# EAGLE board ESP32Breakout (EAGLE 9.5.2)
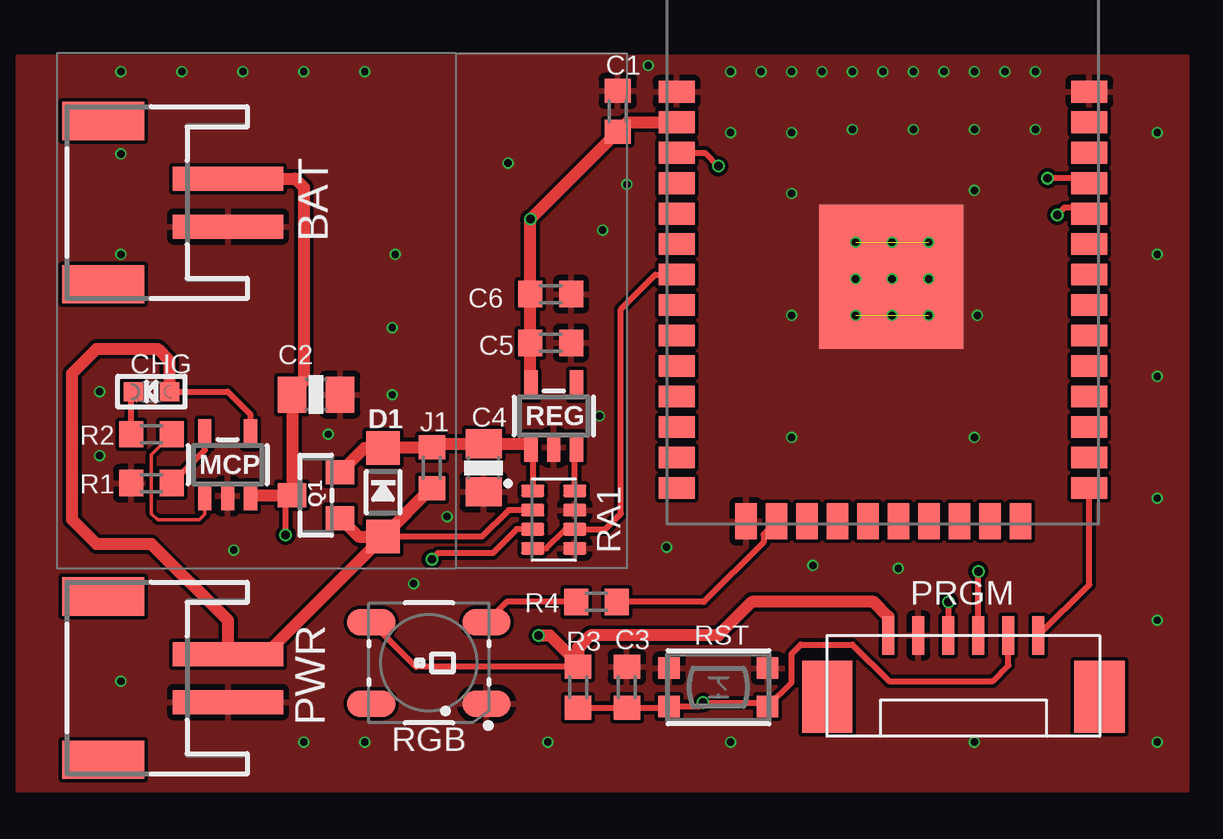
[diagram p0: board, top side]
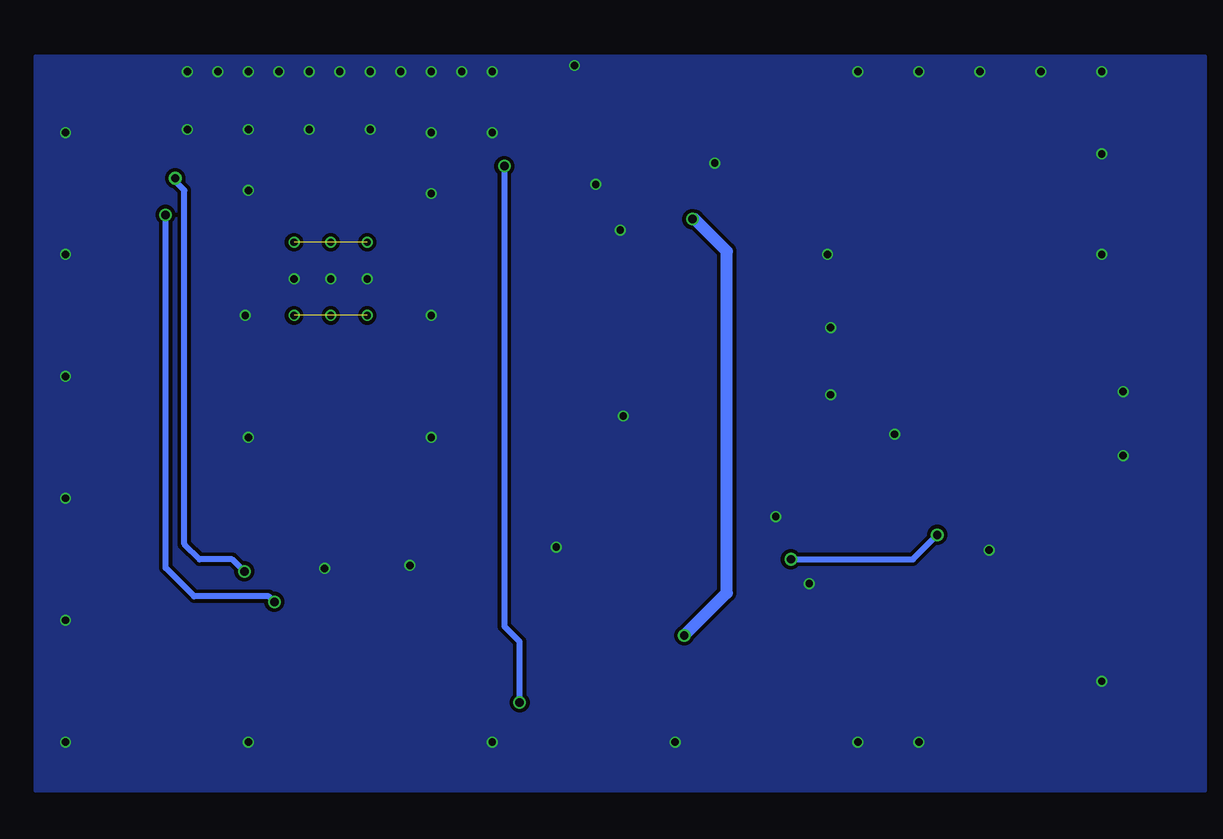
[diagram p1: board, bottom side, seen from below]

No outline drawn. Coordinates in mm, seen from the top.
Copper layers (1*16): Top 0.035559375mm / dielectric 1.6mm / Bottom 0.035559375mm
Design rules "jlcpcb2layer": minimum track width 5mil, minimum drill 12mil, track to track 5mil, track to pad 5mil, pad to pad 5mil, via to via 5mil, smd to smd 5mil, copper to edge 8mil, drill to drill 6mil, minimum pad ring 5mil, minimum via ring 3mil, stop-mask expansion 2.5mil, vias tented up to drill 20mil, thermal gap 10mil

## Footprints (pad centres in the part's own frame; a part is rotated, then mirrored left to right if it is on the bottom)
JST_PH_2.0_2P = smd 1 x 4.6: 1 -1,-3.7; 2 1,-3.7 | smd 1.6 x 3.4: NC1 -3.4,1.5; NC2 3.4,1.5
0603 = smd 1 x 1.1: 1 -0.85,0; 2 0.85,0
0805 = smd 1.2 x 1.5: 1 -1,0; 2 1,0
CHIPLED_0603 = smd 0.8 x 0.8: A 0,-0.75; C 0,0.75
SOD-123 = smd 1.4 x 1.4: A 1.85,0; C -1.85,0
MICROBUILDER_SOT23-5 = smd 0.55 x 1.2: 1 -0.95,-1.3; 2 0,-1.3; 3 0.95,-1.3; 4 0.95,1.3; 5 -0.95,1.3
JST1.25_6P = smd 0.5 x 1.6: 1 0,0; 2 1.25,0; 3 2.5,0; 4 3.75,0; 5 5,0; 6 6.25,0 | smd 2.1 x 3: 7 -2.55,2.55; 8 8.8,2.55
SOT23-WIDE = smd 1 x 1.2: 1 -0.95,-1; 2 0.95,-1; 3 0,1
RESCAF80P320X160X60-8N = smd 0.97 x 0.53: 1 -0.875,1.2; 2 -0.875,0.4; 3 -0.875,-0.4; 4 -0.875,-1.2; 5 0.875,-1.2; 6 0.875,-0.4; 7 0.875,0.4; 8 0.875,1.2
LED-TRICOLOR-5050-IC = smd 2 x 1.1: DIN -2.4,-1.7; DOUT 2.4,1.7; VDD 2.4,-1.7; VSS -2.4,1.7
BTN_KMR2_4.6X2.8 = smd 0.9 x 0.9: A 2.05,0.8; A' -2.05,0.8; B 2.05,-0.8; B' -2.05,-0.8
WROOM32 = smd 1.5 x 0.9: 1 -8.6,5; 2 -8.6,3.73; 3 -8.6,2.46; 4 -8.6,1.19; 5 -8.6,-0.08; 6 -8.6,-1.35; 7 -8.6,-2.62; 8 -8.6,-3.89; 9 -8.6,-5.16; 10 -8.6,-6.43; 11 -8.6,-7.7; 12 -8.6,-8.97; 13 -8.6,-10.24; 14 -8.6,-11.51; 25 8.6,-11.51; 26 8.6,-10.24; 27 8.6,-8.97; 28 8.6,-7.7; 29 8.6,-6.43; 30 8.6,-5.16; 31 8.6,-3.89; 32 8.6,-2.62; 33 8.6,-1.35; 34 8.6,-0.08; 35 8.6,1.19; 36 8.6,2.46; 37 8.6,3.73; 38 8.6,5 | smd 0.9 x 1.5: 15 -5.7,-12.9; 16 -4.43,-12.9; 17 -3.16,-12.9; 18 -1.89,-12.9; 19 -0.62,-12.9; 20 0.65,-12.9; 21 1.92,-12.9; 22 3.19,-12.9; 23 4.46,-12.9; 24 5.73,-12.9 | smd 6 x 6: P$1 0.34,-2.7

## Placement (x,y rotation side)
BAT  JSTPH  [JST_PH_2.0_2P]  -27.18,63.12 90 top
C1  0.1uF  [0603]  -7.24,66.93 90 top
C2  10µF  [0805]  -19.81,55.12 0 top
C3  1uF  [0603]  -6.86,42.93 90 top
C4  10µF  [0805]  -12.83,52.07 270 top
C5  1uF  [0603]  -10.03,57.28 0 top
C6  10µF  [0603]  -10.03,59.31 0 top
CHG  [CHIPLED_0603]  -26.67,55.24 90 top
D1  MBR120  [SOD-123]  -17.02,51.05 270 top
J1  [0603]  -14.99,52.07 90 top
MCP  MCP73831  [MICROBUILDER_SOT23-5]  -23.5,52.2 0 top
PRGM  JST_1.25_6P  [JST1.25_6P]  10.29,45.09 180 top
PWR  JST_PH_2.0_2P  [JST_PH_2.0_2P]  -27.18,43.31 90 top
Q1  DMG3415U  [SOT23-WIDE]  -19.81,50.93 90 top
R1  4.7k  [0603]  -26.67,51.44 180 top
R2  1k  [0603]  -26.67,53.47 0 top
R3  10k  [0603]  -8.89,42.93 90 top
R4  [0603]  -8.13,46.48 0 top
RA1  [RESCAF80P320X160X60-8N]  -9.91,49.91 0 top
REG  AP2112-3.3  [MICROBUILDER_SOT23-5]  -9.91,54.23 0 top
RGB  LED_WS2812  [LED-TRICOLOR-5050-IC]  -15.11,43.94 180 top
RST  KMR2  [BTN_KMR2_4.6X2.8]  -3.05,42.93 0 top
X2  ESP32_WROOM32  [WROOM32]  3.81,62.74 0 top

## Library data of the parts
BAT PRGM PWR = Scott-Connectors
C1-C6 CHG D1 J1 Q1 R1-R4 RA1 = Scott-Electrical
MCP REG RGB = Scott-ICs
RST = Scott-Switches
X2 = Scott-MCU

## Nets
3.3V: C1.1 C5.1 C6.1 PRGM.6 R3.2 REG.5 RGB.VDD X2.2
A13_I35: RA1.4 RA1.6 X2.7
EN: RA1.8 REG.3
GND: BAT.1 C1.2 C2.2 C3.2 C4.2 C5.2 C6.2 MCP.2 PRGM.5 PWR.1 R1.2 RA1.5 RA1.7 REG.2 RGB.VSS RST.A RST.A' X2.1 X2.15 X2.38 X2.P$1
GPIO0: PRGM.1 X2.25
IO13_A12: R4.2 X2.16
N$1: CHG.C R2.1
N$2: R4.1 RGB.DIN
N$3: MCP.1 R2.2
N$4: MCP.5 R1.1
N$7: C4.1 D1.C J1.2 Q1.2 RA1.1 REG.1
RESET: C3.1 PRGM.2 R3.1 RST.B RST.B' X2.3
RXD0: PRGM.4 X2.34
TXD0: PRGM.3 X2.35
VBAT: BAT.2 C2.1 MCP.3 Q1.3 RA1.3
VBUS: CHG.A D1.A J1.1 MCP.4 PWR.2 Q1.1 RA1.2

## Tracks (layer width: path | path; a pad name or v marks a point on that pad's centre or on a via)
3.3V  (via drill 0.35)
  Top 0.254: RGB.VDD -15.65,43.78 R3.2 -8.89,43.9
  Top 0.508: REG.5 -10.88,55.56 C5.1 C6.1 v-10.88,62.44 C1.1 -6.85,66.47 X2.2 | -8.89,43.9 -10.07,45.09 v-10.54,45.09 | PRGM.6 4.04,45.87 3.43,46.48 -1.65,46.48 -3.05,45.09 -8.38,45.09 -8.89,44.58 R3.2
  Bottom 0.254: -10.97,62.44 v-10.88,62.44
  Bottom 0.508: v-10.54,45.09 -12.32,46.86 -12.32,61.09 -10.97,62.44
A13_I35
  Top 0.254: RA1.4 -10.22,48.71 -9.42,49.51 RA1.6 -7.77,49.51 -7.11,50.16 -7.11,58.67 -5.67,60.12 X2.7
EN
  Top 0.254: RA1.8 -9.03,52.85 REG.3
GND  (via drill 0.3)
  other vias: 4.19,59.94 2.67,59.94 5.71,59.94 -2.54,68.58 -1.27,68.58 1.27,68.58 0,68.58 2.54,68.58 3.81,68.58 5.08,68.58 6.35,68.58 7.62,68.58 8.89,68.58 10.16,68.58 -27.94,65.15 -27.94,60.96 -16.51,60.96 -11.81,64.77 -6.86,63.88 -7.87,61.98 -2.54,66.04 0,66.04 2.54,66.17 5.08,66.17 7.62,66.17 10.16,66.17 7.62,63.63 7.75,58.42 7.62,53.34 0,53.34 0,58.42 0,63.5 4.45,47.88 0.89,48.01 -5.21,48.77 -23.24,48.64 -27.94,43.18 -20.32,40.64 -17.78,40.64 -10.16,40.64 -2.54,40.64 7.62,40.64 15.24,40.64 15.24,45.72 15.24,50.8 15.24,55.88 15.24,60.96 15.24,66.04 -8,54.23 -15.75,47.24 -28.83,52.58 -28.83,55.24 -19.3,53.47 -14.35,50.04 -16.64,57.91 -16.64,55.12 -5.97,68.83 -17.78,68.58 -20.32,68.58 -22.86,68.58 -25.4,68.58 -27.94,68.58
  pour Top (isolate 0.152, rank 6): -32.26,38.61 16.51,38.61 16.51,69.22 -32.26,69.22
  pour Bottom (isolate 0.152, rank 6): -32.26,38.61 -32.26,69.22 16.51,69.22 16.51,38.61
  pour Top (isolate 0.152, no thermals): -0.76,64.77 -0.76,55.5 9.02,55.5 9.02,64.77
GND1  (via drill 0.3)  (2 unrouted)
  other vias: 4.19,61.47 2.67,61.47 5.71,61.47
GND2  (via drill 0.3)  (2 unrouted)
  other vias: 4.19,58.42 2.67,58.42 5.71,58.42
GPIO0
  Top 0.254: PRGM.1 12.41,47.21 X2.25
IO13_A12
  Top 0.254: X2.16 -1.16,49.3 -1.16,48.97 -3.65,46.48 R4.2
N$1
  Top 0.254: R2.1 -27.52,55.15 CHG.C
N$2
  Top 0.254: R4.1 -11.87,46.48 RGB.DIN
N$3
  Top 0.152: MCP.1 -24.45,50.13 -24.67,49.91 -26.42,49.91 -26.67,50.16 -26.67,52.62 R2.2
N$4
  Top 0.254: R1.1 -24.45,52.81 MCP.5
N$7
  Top 0.254: REG.1 -10.78,52.85 RA1.1
  Top 0.508: Q1.2 -17.79,52.9 D1.C -17,52.92 J1.2 -14.84,53.07 C4.1 -11,53.07 REG.1
RESET  (via drill 0.35)
  Top 0.254: R3.1 C3.1 -5.15,42.08 RST.B' -3.85,42.13 v-3.68,42.29 -1.16,42.29 RST.B 0,43.12 0,44.32 0.38,44.7 2.54,44.7 4.06,43.18 8.38,43.18 9.04,43.84 PRGM.2 | X2.3 -3.6,65.2 v-3.05,64.64
  Bottom 0.254: v-3.68,42.29 -3.68,44.83 -3.05,45.47 v-3.05,64.64
RXD0  (via drill 0.35)
  Top 0.254: v6.54,46.48 PRGM.4 | v11.07,62.61 11.37,62.91 12.16,62.91 X2.34
  Bottom 0.254: v6.54,46.48 6.77,46.71 9.88,46.71 11.07,47.9 v11.07,62.61
TXD0  (via drill 0.35)
  Top 0.254: PRGM.3 v7.79,47.75 | X2.35 12.2,64.14 v10.67,64.14
  Bottom 0.254: v7.79,47.75 8.29,48.26 9.65,48.26 10.29,48.9 10.29,63.63 10.67,64.01 v10.67,64.14
VBAT  (via drill 0.35)
  Top 0.254: RA1.3 -11.45,49.51 -12.45,48.51 -14.73,48.51 v-14.99,48.26 | v-21.08,49.28 -21.08,50.66 Q1.3
  Top 0.508: MCP.3 -22.52,50.93 Q1.3 -20.84,50.96 -20.81,50.99 C2.1 -20.84,55.15 -20.32,55.67 -20.32,63.75 -20.68,64.12 BAT.2
  Bottom 0.254: v-14.99,48.26 -20.07,48.26 v-21.08,49.28
VBUS
  Top 0.254: CHG.A -23.5,55.24 -22.55,54.3 MCP.4 | RA1.2 -11.79,50.31 -12.9,49.2 D1.A
  Top 0.508: Q1.1 -18.04,49.2 D1.A | D1.A -21.91,44.31 PWR.2 -23.48,45.7 -26.67,48.9 -28.96,48.9 -29.97,49.91 -29.97,56.01 -28.96,57.02 -26.42,57.02 -25.92,56.53 CHG.A | D1.A -15,51.22 J1.1

## Text on the board
tDocu: 3V3 / Reg/Filter | LiPo Charging